# Altium PCB MainFCC_PCBBoard.PcbDoc (part 2 of 3)
Units mm, origin at the board's own origin, x right, y up, seen from the top; angles counter-clockwise.
Board outline 100 x 50 mm, 6 copper layers (Top Signal, GND1, Power, Signal, GND 2, Bottom Signal), stack 1.642 mm thick; 119 components, 79 nets, 546 pads, 1133 vias.
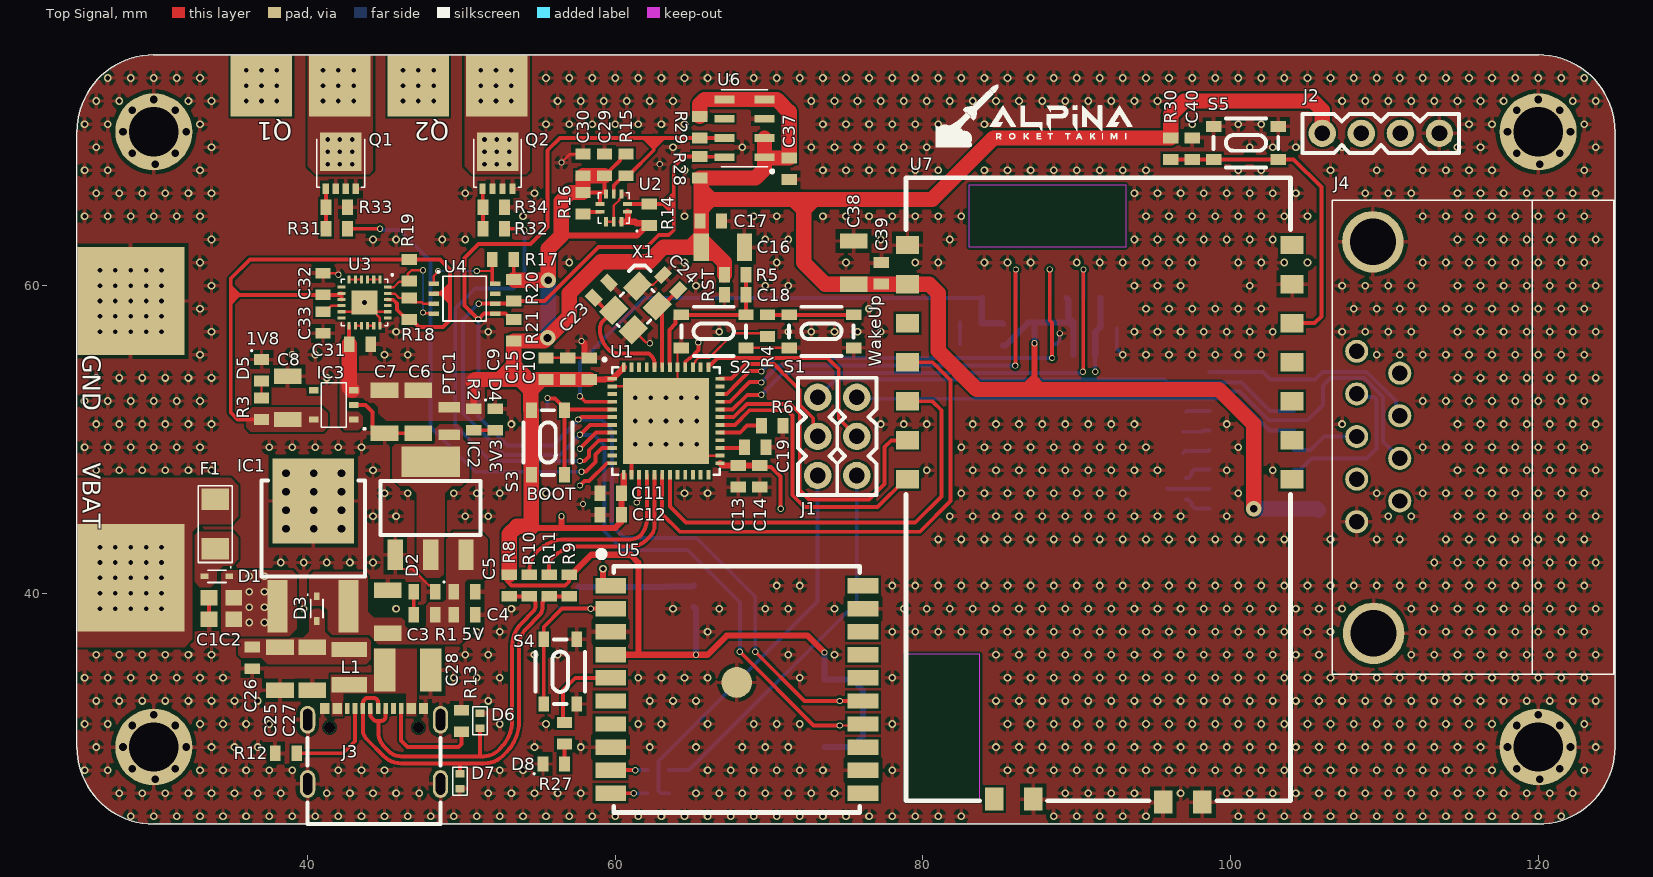
[diagram p0: Top Signal view]

## Part data (continued)
S1 S2 S3 S4 S5: library part MergenElektronik_Switches_TactileSwitches_PTS815-SJM, "Mergen Elektronik - Switches - Tactile  Switches", Current Rating=50mA, Manufacturer=C&K, Manufacturer Number="PTS815 SJM 250 SMTR LFS", Package=PTS815, Supplier Part Number 1=611-PTS815SJM250SMTR, Temperature="-20°C up to +70°C", Voltage Rating=12VDC, Digi-Key Number=CKN12215-1-ND, Farnell Number=3780619, Model="Tactile Switches", Mounting Type="Surface Mount", Mouser Number=611-PTS815SJM250SMTR, Supplier 1=Mouser, Supplier 2=Digi-Key, Supplier Part Number 2=CKN12215-6-ND
U1: library part MergenElektronik_Microcontrollers_STMicroelectronics_STM32F411CEU6, "Mergen Elektronik - Microcontrollers - STMicroelectronics - STM32F411CEU6", Manufacturer=STMicroelectronics, Operating Supply Voltage="1.7V up to 3.6V", Package=UFQFPN-48, Supplier Part Number 1=497-14907-ND, Temperature="-40°C up to 85°C (TA)", Core Size=32-Bit, Digi-Key Number=497-14907-ND, Farnell Number=3365489, Manufacturer Number=STM32F411CEU6, Memory Size=512kB, Model="ARM® Cortex®-M4 Microcontroller", Mounting Type="Surface Mount", Mouser Number=511-STM32F411CEU6, Number of I/O=36, Ram Size="128K x 8", Speed="100MHz with PLL", Supplier 1=Digikey, Supplier 2=Mouser, Supplier Part Number 2=511-STM32F411CEU6
U2: library part MergenElektronik_Sensors_PressureSensors_BMP390, "Mergen Elektronik - Sensors - Pressure Sensors - BMP390", Manufacturer="Bosch Sensortec", Operating Pressure="4.35PSI ~ 18.13PSI (30kPa ~ 125kPa)", Operrating Supply Voltage="1.65V up to 3.6V", Package=10-WFLGA, Temperature="-40°C up to 85°C (TA)", Tolerance="±0.01PSI (0.05kPa)", Digi-Key Number=828-BMP390TR-ND, Manufacturer Number=BMP390, Model="Pressure Sensor", Mounting Type="Surface Mount", Mouser Number=262-BMP390, Output Type="I2C, SPI", Supplier 1=Digikey, Supplier 2=Mouser, Supplier Number 1=828-BMP390TR-ND, Supplier Number 2=262-BMP390, Özdisan Number=BMP390
U3: library part MergenElektronik_Sensors_Gyroscope-Accelerometer-Magnetometer_ICM-20948, "Mergen Elektronik - Sensors - Gytoscope - Accelometer - Magnetometer - ICM-20948", Manufacturer="TDK InvenSense", Operating Supply Voltage="1.7VDC up to 3.6VDC", Package=24-QFN, Temperature="-40°C up to 85°C", Digi-Key Number=1428-1123-2-ND, Farnell Number=2911498, Manufacturer Number=ICM-20948, Model="Gyroscope-Accelerometer-Magnetometer Sensor", Mounting Type="Surface Mount", Mouser Number=410-ICM-20948, Output Type="I2C, SPI", Supplier 1=Digi-Key, Supplier 2=Mouser, Supplier Number 1=1428-1123-2-ND, Supplier Number 2=410-ICM-20948, Özdisan Number=ICM-20948
U4: library part MergenElektronik_Logics_LevelShifters_PCA9306DCTR, "Mergen Elektronik - Logics - Level Shifters - PCA9306DCTR", Manufacturer="Texas Instruments", Package=SSOP-8, Supplier Part Number 1=296-18509-2-ND, Temperature="-40°C up to +105°C", Voltage Rating="1.2V up to 5.5V", Applications="I2C, UART , SMBUS, PMBUS, Two Signal Interfaces", Circuit Channels=2, Digi-Key Number=296-18509-2-ND, Farnell Number=3120911, Features="Auto-Direction Sensing", Manufacturer Number=PCA9306DCTR, Model="Level Shifters", Mounting Type="Surface Mount", Mouser Number=595-PCA9306DCTR, Outpu Type="Open Drain, Push-Pull", Supplier 1=Digi-Key, Supplier 2=Mouser, Supplier Part Number 2=595-PCA9306DCTR
U5: library part MergenElektronik_Modules_GPS, "Mergen Elektronik -  Modules - GPS - CD-PA1616S", Manufacturer=Adafruit, Manufacturer Number=790, Operating Supply Voltage="3.0 up to 5.5VDC", Temperature="-40 °C  up to +85 °C", Tolerance="< 3 meters", Model="GPS Module", Mounting Type="Surface Mount", Package=CD-PA1616S, Update Rate="1Hz up to 10 Hz"
U6: library part MergenElektronik_Sensors_AltimeterSensors_MS561101BA03-50, "Mergen Elektronik - Sensors - Altimeter Sensors - MS561101BA03-50", Manufacturer="TE Connectivity Measurement Specialties", Operating Pressure="0.15PSI up to 17.4PSI (1kPa up to 120kPa)", Operating Supply Voltage="1.8V up to 3.6V", Supplier Part Number 1=223-1622-2-NDv, Temperature="-40°C up to 85°C", Tolerance="±0.022PSI (±0.15kPa)", Digi-Key Number=223-1622-2-NDv, Farnell Number=2362662, Manufacturer Number=MS561101BA03-50, Model="Altimeter Sensor", Mounting Type="Surface Mount", Mouser Number=824-MS561101BA03-50, Output Type="I2C, SPI", Package=MS561101BA03-50, Supplier 1=Digi-Key, Supplier 2=Mouser, Supplier Part Number 2=824-MS561101BA03-50, Özdisan Number=MS561101BA03-50
U7: library part MergenElektronik_Modules_LoRas_Ebyte-E32-868T30s, "Mergen Elektronik - Modules - LoRas - Ebyte-E32-868T30s", Frequency=862-893MHz, Manufacturer=Ebyte, Manufacturer Number=E32-868T30s, Power=30dBm, Distance="8 km", IC=SX1276, Interface=UART